# EAGLE board hurricanePCR (EAGLE 6.1)
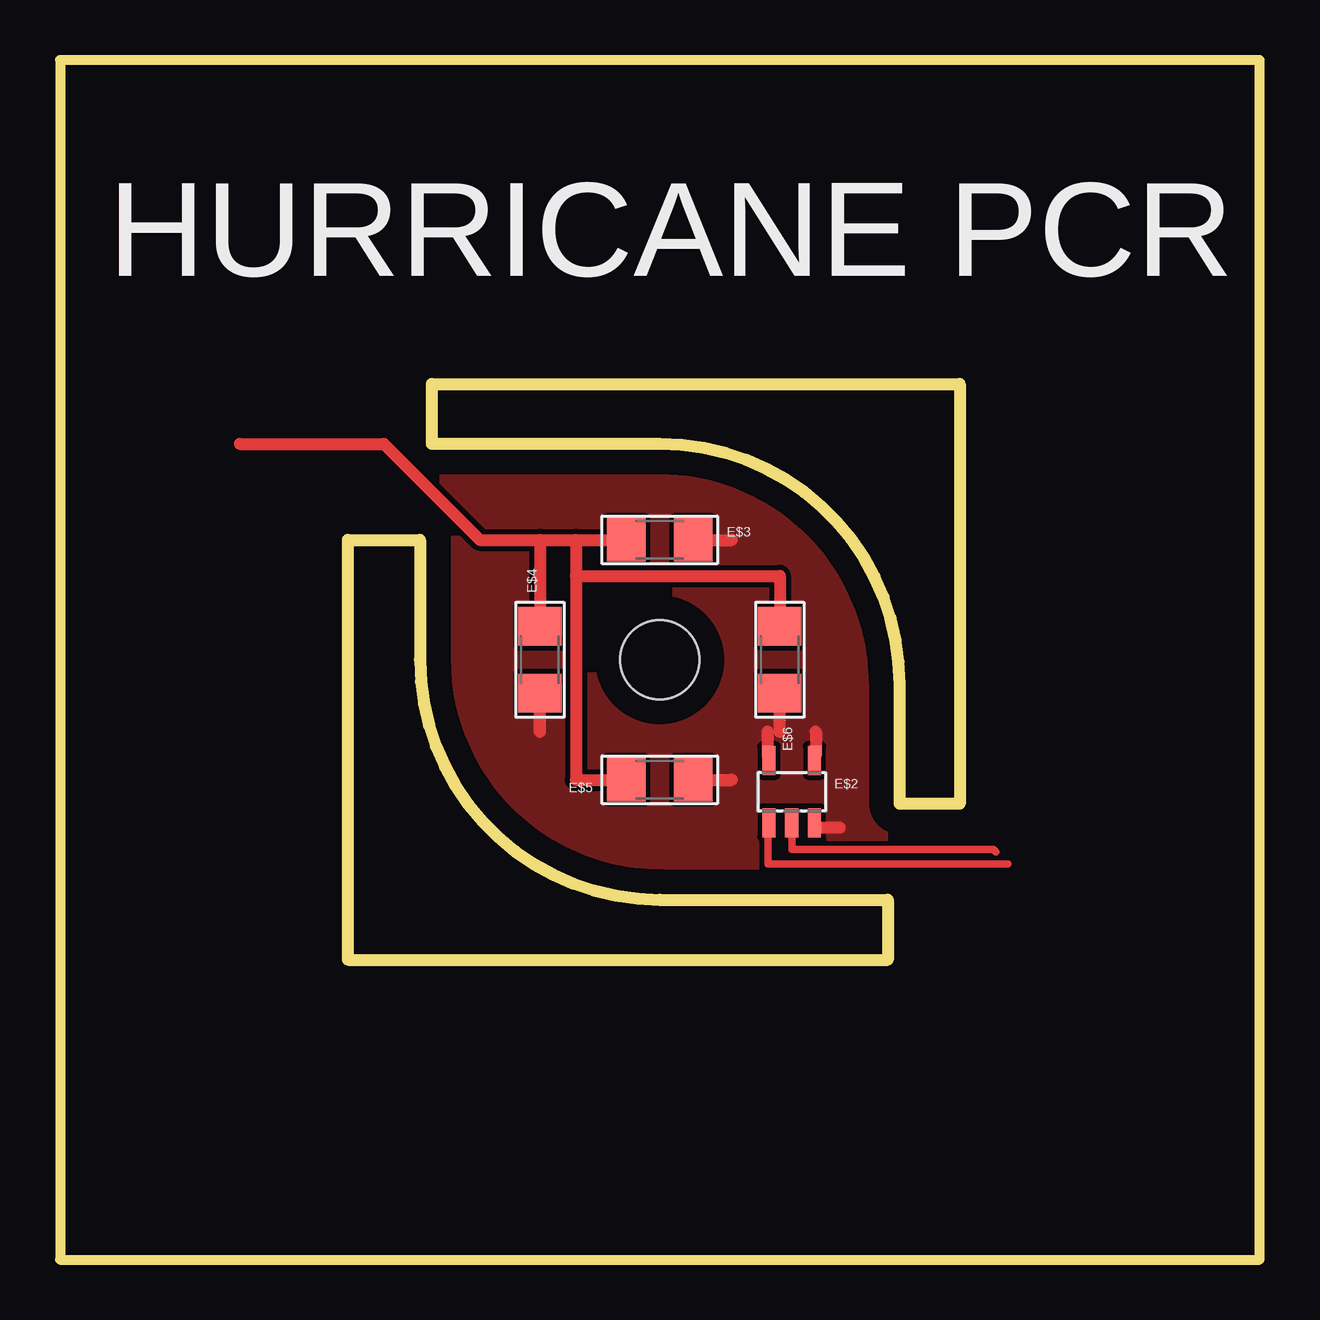
[diagram p0: board, top side]

Size 50 x 50 mm. Coordinates in mm from the lower left corner, seen from the top.
Outline: 0,0 50,0 50,50 0,50 0,0
Outline: 15,30 15,25 arc90 25,15 34.5,15 34.5,12.5 12,12.5 12,30 15,30
Outline: 35,19 35,24 arc90 25,34 15.5,34 15.5,36.5 37.5,36.5 37.5,19 35,19
Copper layers (1*16): Top 0.035mm / dielectric 1.5mm / Bottom 0.035mm
Design rules: minimum track width 10mil, minimum drill 0.6mm, track to track 8mil, track to pad 8mil, pad to pad 8mil, via to via 8mil, smd to smd 8mil, copper to edge 40mil, drill to drill 8mil, minimum pad ring 10mil, minimum via ring 8mil, stop-mask expansion 4mil, vias tented up to drill 0mil, thermal gap 10mil

## Footprints (pad centres in the part's own frame; a part is rotated, then mirrored left to right if it is on the bottom)
STAND-OFF = hole 3.302: 0,0
SOT23-5 = smd 0.55 x 1.2: 1 -0.95,-1.3; 2 0,-1.3; 3 0.95,-1.3; 4 0.95,1.3; 5 -0.95,1.3
1206 = smd 1.6 x 1.8: 1 -1.4,0; 2 1.4,0

## Placement (x,y rotation side)
E$1  [STAND-OFF]  25,25 0 top
E$2  tmp36  [SOT23-5]  30.5,19.5 0 top
E$3  10o  [1206]  25,30 0 top
E$4  10o  [1206]  20,25 90 top
E$5  10o  [1206]  25,20 180 top
E$6  10o  [1206]  30,25 270 top

## Library data of the parts
E$1 = SparkFun
E$2 = microbuilder
E$3-E$6 = nonolith

## Tracks (layer width: path | path; a pad name or v marks a point on that pad's centre or on a via)
CTRL
  Top 0.508: 20,30 20,27 | 20,30 21.5,30 | 21.5,30 23,30 | 23,20 21.5,20 21.5,28.5 | 21.5,30 21.5,28.5 | 30,27 30,28.5 21.5,28.5 | 20,30 17.5,30 13.5,34 7.5,34
GND
  Top 0.508: 20,22 20,23.5 | 27,20 28,20 | 30,22 30,23 | 27,30 28,30 | 29.5,21 29.5,22 | 31.5,22 31.5,21 | 32.5,18 31.5,18
  pour Top: 15.5,34 15.5,15 35,15 35,30 31,34
S$1
  Top 0.305: 29.5,18 29.5,16.5 39.5,16.5
S$2
  Top 0.305: 30.5,18 30.5,17.1 38.9,17.1 39,17

## Text on the board
tNames: HURRICANE PCR